# Altium PCB PCB1.PcbDoc
Units mm, origin at the board's own origin, x right, y up, seen from the top; angles counter-clockwise.
Board outline 86 x 56 mm, 2 copper layers (Top Layer, Bottom Layer), stack 1.771 mm thick; 13 components, 64 nets, 149 pads, 43 vias.
Unrouted connection lines stored in the file: 1.
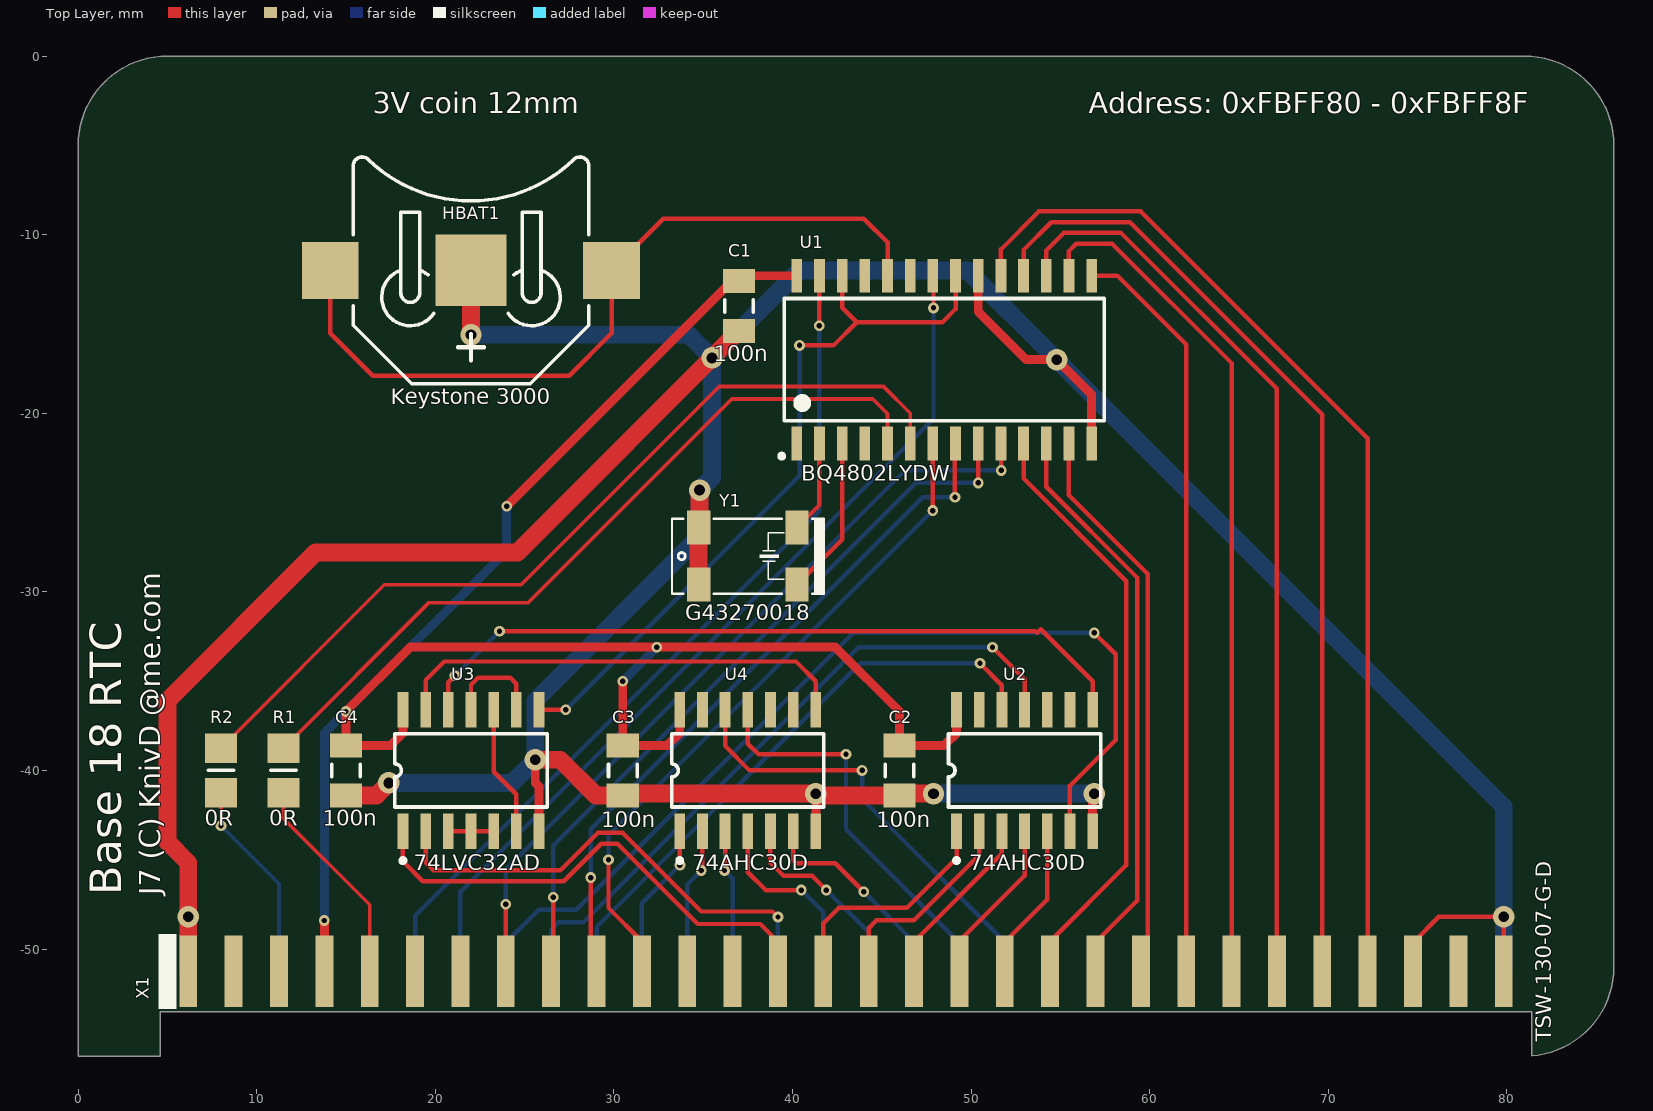
[diagram p0: Top Layer view]
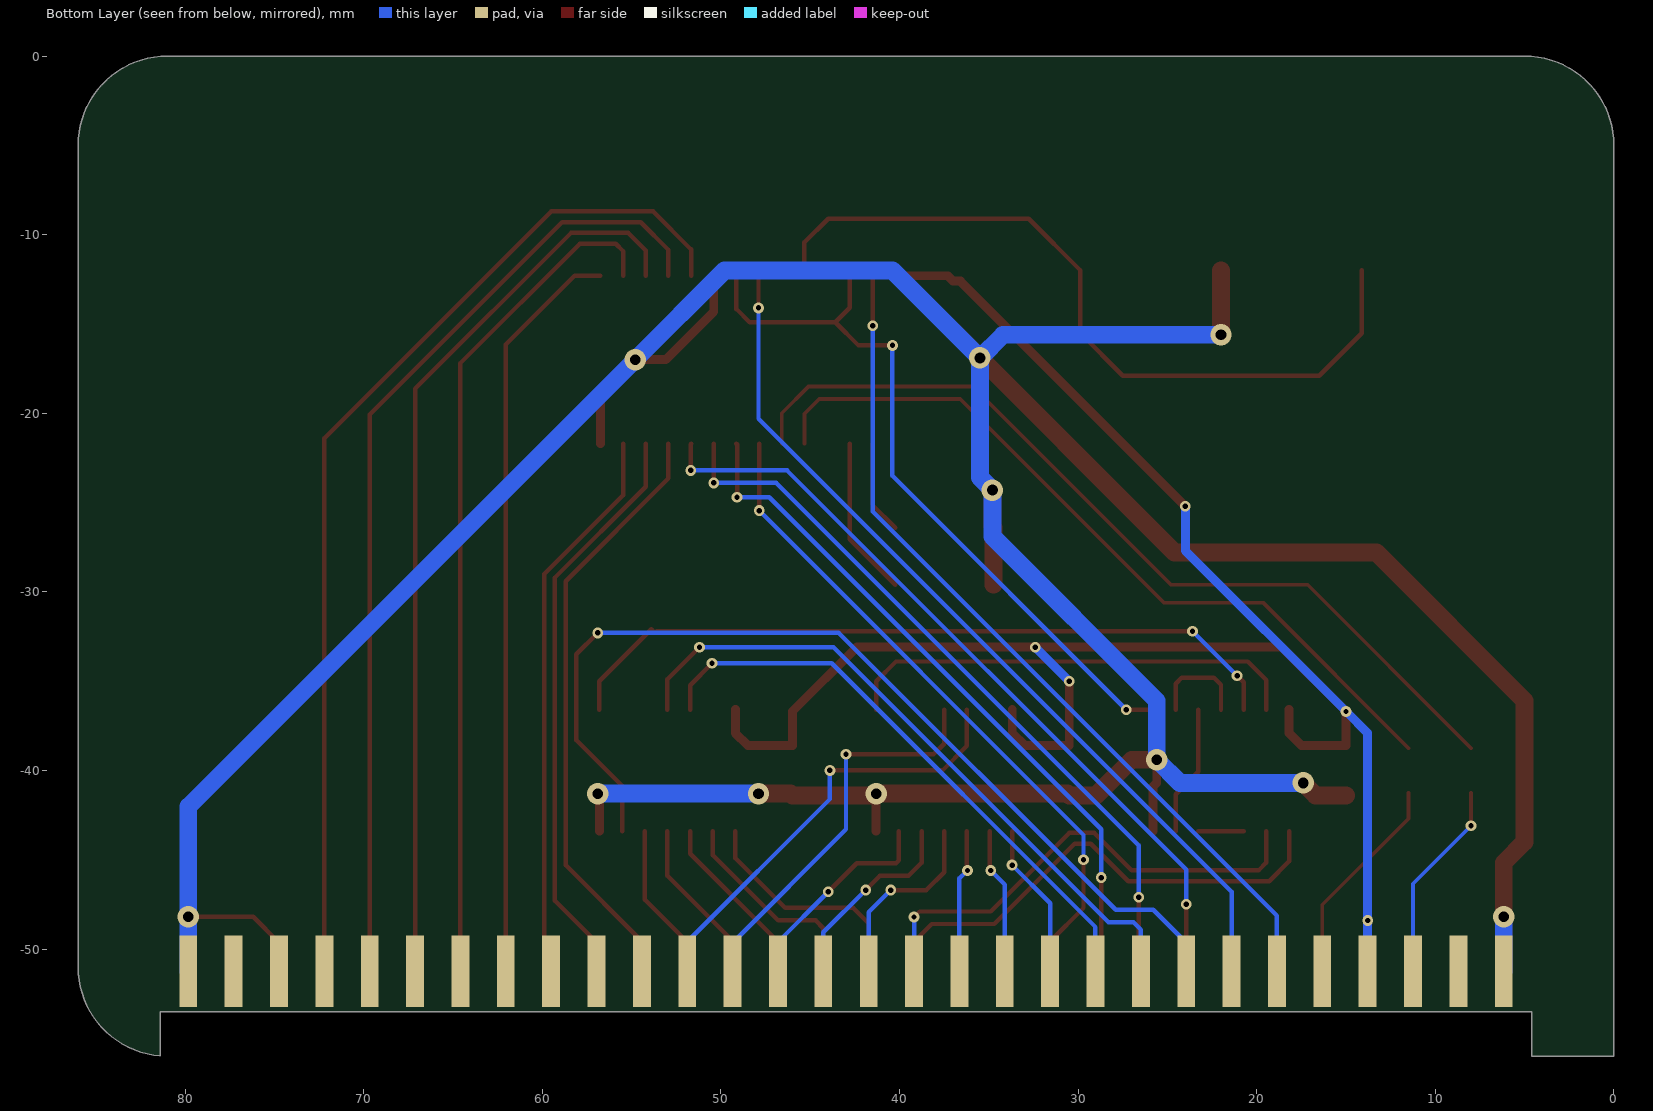
[diagram p1: Bottom Layer view, seen from below]
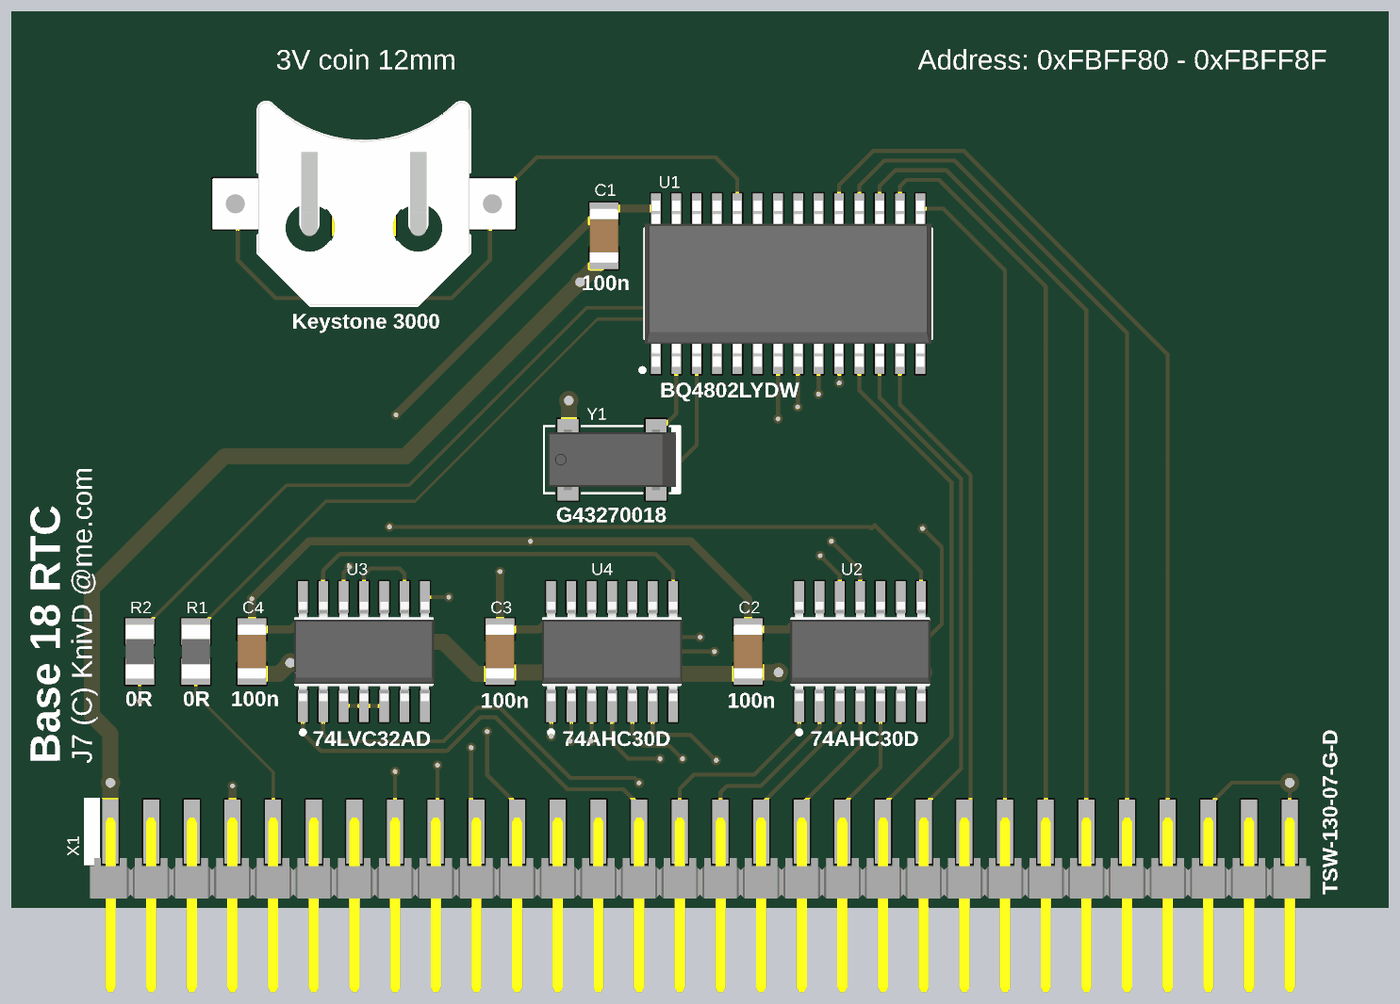
[diagram p2: 3D render of the assembled board from above, using the file's embedded part models]

## Layer stack, top to bottom
Top Solder: solder mask 0.0102, Solder Resist, Dk 3.5
Top Layer: signal copper 0.0356
Dielectric 1: core 1.7, FR-4, Dk 4.2
Bottom Layer: signal copper 0.0356
Solder Side: solder mask 0.0102, Solder Resist, Dk 3.5

## Board outline
0,-56 0,-5 cw(c5,-5) 5,0 81,0 cw(c81,-5) 86,-5 86,-51 cw(c81,-51) 81.399,-55.984 81.4,-55.984 81.4,-53.5 4.6,-53.5 4.6,-56

## Design rules (kind name [scope] priority, off if disabled: settings)
Clearance Clearance_Pour [IsRegion] p1: gap=0.3 ignorepadtopadclearanceinfootprint=TRUE
Clearance [All] p2: gap=0.2 ignorepadtopadclearanceinfootprint=TRUE
Height [All] p1: minheight=0 maxheight=100 prefheight=12.7
HoleSize [All] p1: absolutevalues=TRUE maxlimit=5 minlimit=0.025 maxpercent=80.000 minpercent=20.000
HoleToHoleClearance [All] p1: gap=0 allowstackedmicrovias=TRUE
MinimumSolderMaskSliver [All] p1: minsoldermaskwidth=0
PolygonConnect [All] p1: thpad.connectstyle=Relief thpad.reliefconductorwidth=0.25 thpad.reliefentries=4 thpad.polygonreliefangle="90 Angle" thpad.airgapwidth=0.25 smdpad.connectstyle=Relief smdpad.reliefconductorwidth=0.25 smdpad.reliefentries=4 smdpad.polygonreliefangle="90 Angle" smdpad.airgapwidth=0.25 via.connectstyle=Direct via.reliefconductorwidth=0.254 via.reliefentries=4 via.polygonreliefangle="45 Angle" via.airgapwidth=0.254
RoutingVias [All] p1: holewidth=0.3 width=0.6 viastyle="Through Hole" minholewidth=0.25 minwidth=0.5 maxholewidth=1.5 maxwidth=3
SilkToSilkClearance [All] p1: silktosilkclearance=-10
SilkToSolderMaskClearance [IsPad] p1: minsilkscreentomaskgap=-10 clearancetoexposedcopper=TRUE
SolderMaskExpansion SolderMaskExpansion_VIA [IsVia] p1: expansion=-0.3 soldermaskfromhole=TRUE
SolderMaskExpansion [All] p2: expansion=0.102
Width [All] p1: maxlimit=10 minlimit=0.2 preferedwidth=0.25
24 further rules are at their usual default settings.

## Components (designator, comment, footprint, x,y, rotation, side; value= is the part's Value field where it differs from the comment)
C1 "100n" CAPC3216X110N 37,-14 r270 top locked
C2 "100n" CAPC3216X110N 46,-40 r90 top locked
C3 "100n" CAPC3216X110N 30.5,-40 r90 top locked
C4 "100n" CAPC3216X110N 15,-40 r90 top locked
HBAT1 "Keystone 3000" BATH_KEYSTONE_3000 22,-12 r0 top locked
R1 "0R" RESC3216X75N 11.5,-40 r90 top locked
R2 "0R" RESC3216X75N 8,-40 r90 top locked
U1 "BQ4802LYDW" SOIC127P1032X265-28N 48.5,-17 r90 top locked
U2 "74AHC30D" SOIC14 53,-40 r90 top locked
U3 "74LVC32AD" SOIC14 22,-40 r90 top locked
U4 "74AHC30D" SOIC14 37.5,-40 r90 top locked
X1 "TSW-130-07-G-D" DIL60-M-EDGE 43,-50.45 r0 top locked
Y1 "G43270018" "Crystal 79X37 (4)" 37.5,-28 r180 top locked

## Footprints (in the part's own frame and the unit in brackets; to place one, negate y for a bottom-side part, rotate by r counter-clockwise, add the part's x,y. Pads: shape width x height; smd on the part's side, far side on the other; paste and mask are expansions set on the pad)
BATH_KEYSTONE_3000 [mm] "SMD Battery Holder for BR1216, CR1216, BR1220, CL1220, CR1220, BR1225 Coin Cells"
  rect 3.175x3.175 smd: 1(-7.872,0) 1(7.873,0)
  rect 4x4 smd paste-2: 2(0,0)
  silkscreen extent -6.6,-6.35 6.6,6.35, body extent -9.46,-6.35 9.46,6.35, height 3.17
CAPC3216X110N [mm] "Chip Capacitor, Body 3.2x1.6mm, IPC Medium Density"
  rect 1.35x1.8 smd: 1(-1.4,0) 2(1.4,0)
  silkscreen extent -0.35,-0.8 0.35,0.8, body extent -1.7,-0.9 1.7,0.9, height 1.1
"Crystal 79X37 (4)" [mm] "Crystal 7.9 x 3.7 mm, 4 pins (often used for 32.768kHz)"
  rect 1.3x1.9 smd: 0(2.75,1.6) 0(2.75,-1.6) 1(-2.75,-1.6) 2(-2.75,1.6)
  silkscreen extent -4.25,-2.1 4.25,2.1, body extent -4,-1.9 4,1.9, height 2.43
DIL60-M-EDGE [mm] "DIL60 header soldered as edge connector"
  rect 1x4 smd: 1(-36.83,-0.8) 3(-34.29,-0.8) 5(-31.75,-0.8) 7(-29.21,-0.8) 9(-26.67,-0.8) 11(-24.13,-0.8) 13(-21.59,-0.8) 15(-19.05,-0.8) 17(-16.51,-0.8) 19(-13.97,-0.8) 21(-11.43,-0.8) 23(-8.89,-0.8) 25(-6.35,-0.8) 27(-3.81,-0.8) 29(-1.27,-0.8) 31(1.27,-0.8) 33(3.81,-0.8) 35(6.35,-0.8) 37(8.89,-0.8) 39(11.43,-0.8) 41(13.97,-0.8) 43(16.51,-0.8) 45(19.05,-0.8) 47(21.59,-0.8) 49(24.13,-0.8) 51(26.67,-0.8) 53(29.21,-0.8) 55(31.75,-0.8) 57(34.29,-0.8) 59(36.83,-0.8)
  rect 1x4 smd far side: 2(-36.83,-0.8) 4(-34.29,-0.8) 6(-31.75,-0.8) 8(-29.21,-0.8) 10(-26.67,-0.8) 12(-24.13,-0.8) 14(-21.59,-0.8) 16(-19.05,-0.8) 18(-16.51,-0.8) 20(-13.97,-0.8) 22(-11.43,-0.8) 24(-8.89,-0.8) 26(-6.35,-0.8) 28(-3.81,-0.8) 30(-1.27,-0.8) 32(1.27,-0.8) 34(3.81,-0.8) 36(6.35,-0.8) 38(8.89,-0.8) 40(11.43,-0.8) 42(13.97,-0.8) 44(16.51,-0.8) 46(19.05,-0.8) 48(21.59,-0.8) 50(24.13,-0.8) 52(26.67,-0.8) 54(29.21,-0.8) 56(31.75,-0.8) 58(34.29,-0.8) 60(36.83,-0.8)
  silkscreen extent -38.5,-2.9 -37.5,1.3, body extent -38.1,-10.83 38.1,0.09, height 1.64
RESC3216X75N [mm] "Chip Resistor, EIA 1206, Metric 3216, Body 3.2x1.6mm, IPC Medium Density"
  rect 1.65x1.8 smd: 1(-1.25,0) 2(1.25,0)
  silkscreen extent 0,-0.7 0,0.7, body extent -1.67,-0.87 1.68,0.88, height 0.75
SOIC14 [mm] "SOIC14 Package"
  rect 2x0.6 smd: 1(-3.4,3.81) 2(-3.4,2.54) 3(-3.4,1.27) 4(-3.4,0) 5(-3.4,-1.27) 6(-3.4,-2.54) 7(-3.4,-3.81) 8(3.4,-3.81) 9(3.4,-2.54) 10(3.4,-1.27) 11(3.4,0) 12(3.4,1.27) 13(3.4,2.54) 14(3.4,3.81)
  silkscreen extent -5.17,-4.26 2.05,4.26, body extent -3.1,-4.38 3.1,4.37, height 1.75
SOIC127P1032X265-28N [mm] "SOIC,1.27mm, Pitch;28 Pin, 7.50mm W X 17.90mm L X 2.65mm H body, IPC Medium Density"
  rect 1.9x0.6 smd: 1(-4.7,8.255) 2(-4.7,6.985) 3(-4.7,5.715) 4(-4.7,4.445) 5(-4.7,3.175) 6(-4.7,1.905) 7(-4.7,0.635) 8(-4.7,-0.635) 9(-4.7,-1.905) 10(-4.7,-3.175) 11(-4.7,-4.445) 12(-4.7,-5.715) 13(-4.7,-6.985) 14(-4.7,-8.255) 15(4.7,-8.255) 16(4.7,-6.985) 17(4.7,-5.715) 18(4.7,-4.445) 19(4.7,-3.175) 20(4.7,-1.905) 21(4.7,-0.635) 22(4.7,0.635) 23(4.7,1.905) 24(4.7,3.175) 25(4.7,4.445) 26(4.7,5.715) 27(4.7,6.985) 28(4.7,8.255)
  silkscreen extent -5.52,-8.95 3.43,9.22, body extent -5.18,-8.95 5.18,8.95, height 2.65

## Part data
C1 C2 C3 C4: library part Capacitor, "Capacitor"
HBAT1: library part BATH_KEYSTONE_3000, "Battery Holder whit 2 Pin", Manufacturer=KEYSTONE, Manufacturer Part Number=3000, Author="CERN DEM JLC", ComponentHeight=3.17mm, Component Type=Standard, CreateDate=17/04/2012, Family=Battery, HelpURL=\\cern.ch\dfs\Applications\Altium\Datasheets\BATH_KEYSTONE_3000.pdf, LatestRevisionDate=17/04/2012, Mounted=Yes, PackageDescription="SMD Battery Holders for BR1216, CR1216, BR1220, CL1220, CR1220, BR1225 Coin Cells", Part Description="SMD Battery Holders for BR1216, CR1216, BR1220, CL1220, CR1220, BR1225 Coin Cells", Part Number=BATH_KEYSTONE_3000, Pin Count=3, SMD=No, Socket=No, Table=Batteries
R1 R2: library part Resistor, "Resistor"
U1: library part BQ4802LY, "PARALLEL REAL-TIME CLOCK WITH CPU SUPERVISOR AND  EXTERNAL SRAM NONVOLATILE MEMORY BACKUP", Manufacturer="Texas Instruments"
U2 U4: library part 74HCT30N, "8-Input NAND Gate", Case=DIP14-300, Manufacturer="NXP SEMICONDUCTORS", Author="CERN DEM JLC", ComponentHeight=4.2mm, Component Type=Standard, CreateDate=11/12/2012, Device=74HCT30N, HelpURL=\\cern.ch\dfs\Applications\Altium\Datasheets\74HCT30N.pdf, LatestRevisionDate=11/12/2012, Manufacturer Part Number=74HCT30N, Mounted=Yes, PackageDescription="DIP; 14 Leads; Row Spacing 7.62 mm; Pitch 2.54 mm", Part Description="8-Input NAND Gate", Part Number=74HCT30N, Pin Count=11, SMD=No, Socket=Yes, Table="Standard Logic"
U3: library part 74HCT32N, "Quad 2-Input OR Gate", Case=DIP14-300, Manufacturer="NXP SEMICONDUCTORS", Author="CERN DEM JLC", ComponentHeight=4.2mm, Component Type=Standard, CreateDate=11/12/2012, Device=74HCT32N, HelpURL=\\cern.ch\dfs\Applications\Altium\Datasheets\74HCT32N.pdf, LatestRevisionDate=11/12/2012, Manufacturer Part Number=74HCT32N, Mounted=Yes, PackageDescription="DIP; 14 Leads; Row Spacing 7.62 mm; Pitch 2.54 mm", Part Description="Quad 2-Input OR Gate", Part Number=74HCT32N, Pin Count=14, SMD=No, Socket=Yes, Table="Standard Logic"
X1: library part "Connector 2x30", "Dual row, 60-way connector"
Y1: library part "Crystal (ground)", "Crystal Resonator"

## Via types
v1: diameter 0.6, hole 0.3, Top Layer to Bottom Layer, tented both sides, 32 vias
v2: diameter 1.2, hole 0.6, Top Layer to Bottom Layer, tented both sides, 11 vias

## Nets (pads, with @x,y where several pads share a name; then routed paths per layer and width w, separated by ;. In a path a pad name is that pad's centre, name@x,y a point inside that pad or via, vN(x,y) a via of type N, cw(c..) or ccw(c..) an arc to the next point about the centre after c; other vN are vias at no path point)
+3V3: C1.1 C2.2 C3.2 C4.2 U1.28 U2.14 U3.14 U4.14 X1.7 X1.8 | length 113.1
  Top Layer w0.5: X1.7 v1(13.79,-48.4) ; U3.14 18.19,-37.91 17.5,-38.6 C4.2 v1(15,-36.7) 18.6,-33.1 v1(32.4,-33.1) 42.4,-33.1 46,-36.7 C2.2 48.5,-38.6 49.19,-37.91 U2.14 ; v1(24,-25.2) 36.6,-12.6 C1.1 37.3,-12.3 U1.28 ; v1(30.5,-35) C3.2 33,-38.6 33.69,-37.91 U4.14
  Bottom Layer w0.5: X1.8 v1(13.79,-48.4) 13.79,-37.91 v1(15,-36.7) 24,-27.7 v1(24,-25.2) ; v1(30.5,-35) v1(32.4,-33.1)
+Vin: X1.57 X1.58
A00: U1.10 X1.15 | length 44.2
  Top Layer w0.25: X1.15 v1(23.95,-47.5) ; U1.10 51.7,-21.725 v1(51.7,-23.2)
  Bottom Layer w0.25: v1(23.95,-47.5) 23.95,-45.55 46.3,-23.2 v1(51.7,-23.2)
A01: U1.9 X1.17 | length 41.6
  Top Layer w0.25: X1.17 26.5,-51.24 26.4,-51.14 26.6,-50.94 v1(26.6,-47.1) ; v1(50.4,-23.9) 50.4,-21.705 U1.9
  Bottom Layer w0.25: v1(26.6,-47.1) 26.6,-44.2 46.9,-23.9 v1(50.4,-23.9)
A02: U1.8 X1.19 | length 39.2
  Top Layer w0.25: v1(28.7,-46) 28.7,-50.92 X1.19 ; v1(49.1,-24.7) 49.1,-21.735 U1.8
  Bottom Layer w0.25: v1(28.7,-46) 28.7,-43.3 47.3,-24.7 v1(49.1,-24.7)
A03: U1.7 X1.21 | length 37.8
  Top Layer w0.25: v1(29.7,-45) 29.7,-47.7 31.57,-49.57 X1.21 ; v1(47.865,-25.45) U1.7
  Bottom Layer w0.25: v1(29.7,-45) 29.7,-43.615 v1(47.865,-25.45)
A04: X1.23
A05: X1.25
A06: U3.1 X1.27 | length 28
  Top Layer w0.25: U3.1 18.19,-45.09 19.3,-46.2 27.2,-46.2 29.3,-44.1 30.2,-44.1 34.7,-48.6 38.2,-48.6 39.19,-49.59 X1.27
A07: U2.1 X1.29 | length 13.2
  Top Layer w0.25: X1.29 41.73,-48.57 42.6,-47.7 46.4,-47.7 49.19,-44.91 U2.1
A08: U2.2 X1.31 | length 11.6
  Top Layer w0.25: X1.31 44.27,-48.83 44.7,-48.4 46.8,-48.4 50.46,-44.74 U2.2
A09: U2.3 X1.33 | length 9.9
  Top Layer w0.25: X1.33 46.81,-49.59 51.73,-44.67 U2.3
A10: U2.4 X1.35 | length 9.4
  Top Layer w0.25: X1.35 49.35,-49.55 53,-45.9 U2.4
A11: U2.5 X1.37 | length 8.8
  Top Layer w0.25: X1.37 51.89,-49.61 54.27,-47.23 U2.5
A12: U2.6 X1.16 | length 54.4
  Top Layer w0.25: U2.6 55.54,-40.86 58.1,-38.3 58.1,-33.5 v1(56.9,-32.3)
  Bottom Layer w0.25: X1.16 23.95,-49.65 25.8,-47.8 27.9,-47.8 43.4,-32.3 v1(56.9,-32.3)
A13: U2.11 X1.18 | length 37.8
  Top Layer w0.25: v1(51.2,-33.1) 53,-34.9 U2.11
  Bottom Layer w0.25: X1.18 26.49,-48.91 26.9,-48.5 28.3,-48.5 43.7,-33.1 v1(51.2,-33.1)
A14: U2.12 X1.20 | length 33.2
  Top Layer w0.25: v1(50.5,-34) 51.73,-35.23 U2.12
  Bottom Layer w0.25: X1.20 29.03,-48.77 43.8,-34 v1(50.5,-34)
A15: U4.1 X1.22 | length 8.7
  Top Layer w0.25: U4.1 33.7,-43.41 v1(33.7,-45.3)
  Bottom Layer w0.25: X1.22 31.57,-47.43 v1(33.7,-45.3)
A16: U4.2 X1.24 | length 8.2
  Top Layer w0.25: v1(34.9,-45.6) 34.96,-45.54 U4.2
  Bottom Layer w0.25: X1.24 34.11,-46.39 v1(34.9,-45.6)
A17: U4.3 X1.26 | length 8
  Top Layer w0.25: v1(36.2,-45.6) 36.23,-45.57 U4.3
  Bottom Layer w0.25: v1(36.2,-45.6) 36.65,-46.05 X1.26
A18: U3.2 X1.28 | length 27.5
  Top Layer w0.25: U3.2 19.46,-45.16 19.9,-45.6 27,-45.6 29.1,-43.5 30.5,-43.5 34.9,-47.9 38.88,-47.9 v1(39.19,-48.21)
  Bottom Layer w0.25: X1.28 v1(39.19,-48.21)
A19: U4.4 X1.30 | length 10.8
  Top Layer w0.25: U4.4 37.5,-45.7 38.5,-46.7 v1(40.5,-46.7)
  Bottom Layer w0.25: v1(40.5,-46.7) 41.73,-47.93 X1.30
A20: U4.5 X1.32 | length 11.1
  Top Layer w0.25: U4.5 38.77,-45.17 39.5,-45.9 41.1,-45.9 v1(41.9,-46.7)
  Bottom Layer w0.25: v1(41.9,-46.7) 44.27,-49.07 X1.32
A21: U4.6 X1.34 | length 11.9
  Top Layer w0.25: U4.6 40.04,-45.04 40.2,-45.2 42.4,-45.2 v1(44,-46.8)
  Bottom Layer w0.25: v1(44,-46.8) 46.81,-49.61 X1.34
A22: U4.11 X1.36 | length 22.4
  Top Layer w0.25: U4.11 37.5,-38.5 38.1,-39.1 v1(43,-39.1)
  Bottom Layer w0.25: v1(43,-39.1) 43,-43.3 49.35,-49.65 X1.36
A23: U4.12 X1.38 | length 24.8
  Top Layer w0.25: U4.12 36.23,-38.63 37.6,-40 v1(43.9,-40)
  Bottom Layer w0.25: v1(43.9,-40) 43.9,-41.6 51.89,-49.59 X1.38
BUS#: X1.10
CS#: U1.21 U1.26 U3.8 | length 41.7
  Top Layer w0.25: U3.8 v1(27.3,-36.6) ; v1(40.4,-16.2) 42.3,-16.2 43.6,-14.9 ; U1.26 42.785,-14.085 43.6,-14.9 ; U1.21 49.135,-14.165 48.4,-14.9 43.6,-14.9
  Bottom Layer w0.25: v1(27.3,-36.6) 40.4,-23.5 v1(40.4,-16.2)
DB0: U1.11 X1.39 | length 33.7
  Top Layer w0.25: U1.11 52.945,-23.645 58.7,-29.4 58.7,-45.3 54.43,-49.57 X1.39
DB1: U1.12 X1.41 | length 32.6
  Top Layer w0.25: U1.12 54.215,-24.115 59.3,-29.2 59.3,-47.3 56.97,-49.63 X1.41
DB2: U1.13 X1.43 | length 31.5
  Top Layer w0.25: U1.13 55.485,-24.585 59.9,-29 59.9,-50.86 X1.43
DB3: U1.15 X1.45 | length 42
  Top Layer w0.25: U1.15 58.2,-12.3 62.05,-16.15 X1.45
DB4: U1.16 X1.47 | length 47.5
  Top Layer w0.25: U1.16 55.485,-10.915 55.9,-10.5 57.9,-10.5 64.59,-17.19 X1.47
DB5: U1.17 X1.49 | length 51
  Top Layer w0.25: U1.17 54.215,-10.885 55.2,-9.9 58.4,-9.9 67.13,-18.63 X1.49
DB6: U1.18 X1.51 | length 54.5
  Top Layer w0.25: U1.18 52.945,-10.855 54.5,-9.3 58.9,-9.3 69.67,-20.07 X1.51
DB7: U1.19 X1.53 | length 58
  Top Layer w0.25: U1.19 51.675,-10.825 53.8,-8.7 59.5,-8.7 72.21,-21.41 X1.53
GND: C1.2 C2.1 C3.1 C4.1 HBAT1.2 U1.14 U1.20 U2.7 U3.7 U4.7 X1.1 X1.2 X1.55 X1.59 X1.60 Y1.0 | length 252.2
  Top Layer w0.25: X1.55 74.75,-49.65 76.2,-48.2 v2(79.83,-48.2) X1.59
  Top Layer w0.5: v2(25.6,-39.4) 25.6,-40.7 25.81,-40.91 U3.7 ; v2(41.3,-41.3) 41.31,-41.31 U4.7 ; U1.20 50.405,-14.305 53.1,-17 v2(54.8,-17) 56.755,-18.955 U1.14 ; U2.7 56.81,-41.39 v2(56.9,-41.3)
  Top Layer w1: X1.1 v2(6.17,-48.2) 6.17,-45.17 5,-44 5,-36.1 13.3,-27.8 24.6,-27.8 C1.2 ; C4.1 16.7,-41.4 v2(17.4,-40.7) ; v2(22,-15.6) HBAT1.2 ; v2(25.6,-39.4) 27,-39.4 29,-41.4 C3.1 30.6,-41.3 v2(41.3,-41.3) ; Y1.0@34.75,-29.6 34.75,-26.4 34.8,-26.35 v2(34.8,-24.3) ; v2@41.31,-41.31 41.4,-41.4 C2.1 46.1,-41.3 v2(47.9,-41.3)
  Bottom Layer w1: X1.2 v2(6.17,-48.2) ; v2(17.4,-40.7) 24.3,-40.7 v2(25.6,-39.4) 25.6,-36.1 34.8,-26.9 v2(34.8,-24.3) 35.5,-23.6 v2(35.5,-16.9) ; v2(22,-15.6) 34.2,-15.6 v2(35.5,-16.9) ; v2(47.9,-41.3) v2(56.9,-41.3) ; X1.60 v2(79.83,-48.2) 79.83,-42.03 v2(54.8,-17) 49.8,-12 40.4,-12 v2(35.5,-16.9)
INT0#: R1.1 X1.9 | length 12
  Top Layer w0.2: R1.1 11.5,-42.7 16.33,-47.53 X1.9
INT1#: X1.11
INT2#: X1.13
INT#: R1.2 U1.5 | length 43.9
  Top Layer w0.2: R1.2 19.65,-30.6 25.2,-30.6 36.6,-19.2 44.5,-19.2 45.325,-20.025 U1.5
MCLR#: X1.5
MISO: X1.48
MOSI: X1.46
NetHBAT1_1: HBAT1.1 U1.24 | length 43.8
  Top Layer w0.25: HBAT1.1@14.128,-12 14.128,-15.527 16.5,-17.9 27.5,-17.9 29.873,-15.527 29.873,-12 32.773,-9.1 44,-9.1 45.325,-10.425 U1.24
NetU1_2: U1.2 Y1.1 | length 5.2
  Top Layer w0.25: Y1.1 41.515,-25.135 U1.2
NetU1_3: U1.3 Y1.2 | length 9
  Top Layer w0.25: Y1.2 42.785,-27.065 U1.3
NetU2_8: U2.8 U3.12 | length 41.7
  Top Layer w0.25: U3.12 20.73,-35.07 v1(21.1,-34.7) ; v1(23.6,-32.2) 53.6,-32.2 53.7,-32.3 53.9,-32.1 56.81,-35.01 U2.8
  Bottom Layer w0.25: v1(21.1,-34.7) v1(23.6,-32.2)
NetU3_3: U3.3 U3.4 U3.5 | length 2.5
  Top Layer w0.25: U3.3 U3.4 U3.5
NetU3_6: U3.6 U3.10 | length 7.3
  Top Layer w0.25: U3.10 23.27,-40.07 24.54,-41.34 U3.6
NetU3_9: U3.9 U3.11 | length 5.7
  Top Layer w0.25: U3.11 22,-35.2 22.4,-34.8 24.2,-34.8 24.54,-35.14 U3.9
NetU3_13: U3.13 U4.8 | length 26
  Top Layer w0.25: U3.13 19.46,-34.94 20.5,-33.9 40.2,-33.9 41.31,-35.01 U4.8
RD#: U1.22 X1.14 | length 49.9
  Top Layer w0.25: U1.22 47.9,-12.335 v1(47.9,-14.1)
  Bottom Layer w0.25: X1.14 21.41,-46.79 47.9,-20.3 v1(47.9,-14.1)
RESET#: R2.1 X1.6 | length 11.3
  Top Layer w0.2: v1(8,-43.1) R2.1
  Bottom Layer w0.2: v1(8,-43.1) 11.25,-46.35 X1.6
RST#: R2.2 U1.6 | length 49.3
  Top Layer w0.2: R2.2 17.15,-29.6 24.8,-29.6 35.9,-18.5 45.1,-18.5 46.595,-19.995 U1.6
RXD: X1.42
SCLK: X1.44
SEL0#: X1.50
SEL1#: X1.52
SEL2#: X1.54
SEL3#: X1.56
TXD: X1.40
VCC: 
WR#: U1.27 X1.12 | length 48.3
  Top Layer w0.25: v1(41.5,-15.1) 41.515,-15.085 U1.27
  Bottom Layer w0.25: X1.12 18.87,-48.13 41.5,-25.5 v1(41.5,-15.1)
pads on no net: U1.1 U1.4 U1.23 U1.25 U2.9 U2.10 U2.13 U4.9 U4.10 U4.13 X1.3 X1.4

## Silkscreen, mask and mechanical layers (free items; w line width, h text height)
Top Overlay:
  text "3V coin 12mm" at 16.5,-3.6 h2
  text "Address: 0xFBFF80 - 0xFBFF8F" at 56.6,-3.6 h2
  text "Base 18 RTC" at 3,-47 h3 r90
  text "J7 (C) KnivD @me.com" at 5,-47 h2 r90
Mechanical 1:
  lines w0.4: 81.399,-55.984 ccw(c81,-51) 86,-51 86,-5 ccw(c81,-5) 81,0 5,0 ccw(c5,-5) 0,-5 0,-56 4.6,-56 4.6,-53.5 81.4,-53.5 81.4,-55.984
Drill Drawing:
  text "PCB parameters: HASL, FR-4, 1.8mm / 1oz, green soldermask, white overlay" at 7.5,-69 h2